# Altium PCB PCB1.PcbDoc
Units mm, origin at the board's own origin, x right, y up, seen from the top; angles counter-clockwise.
Board outline 152.4 x 101.6 mm, 2 copper layers (Top Layer, Bottom Layer); 12 components, 12 nets, 31 pads, 0 vias.
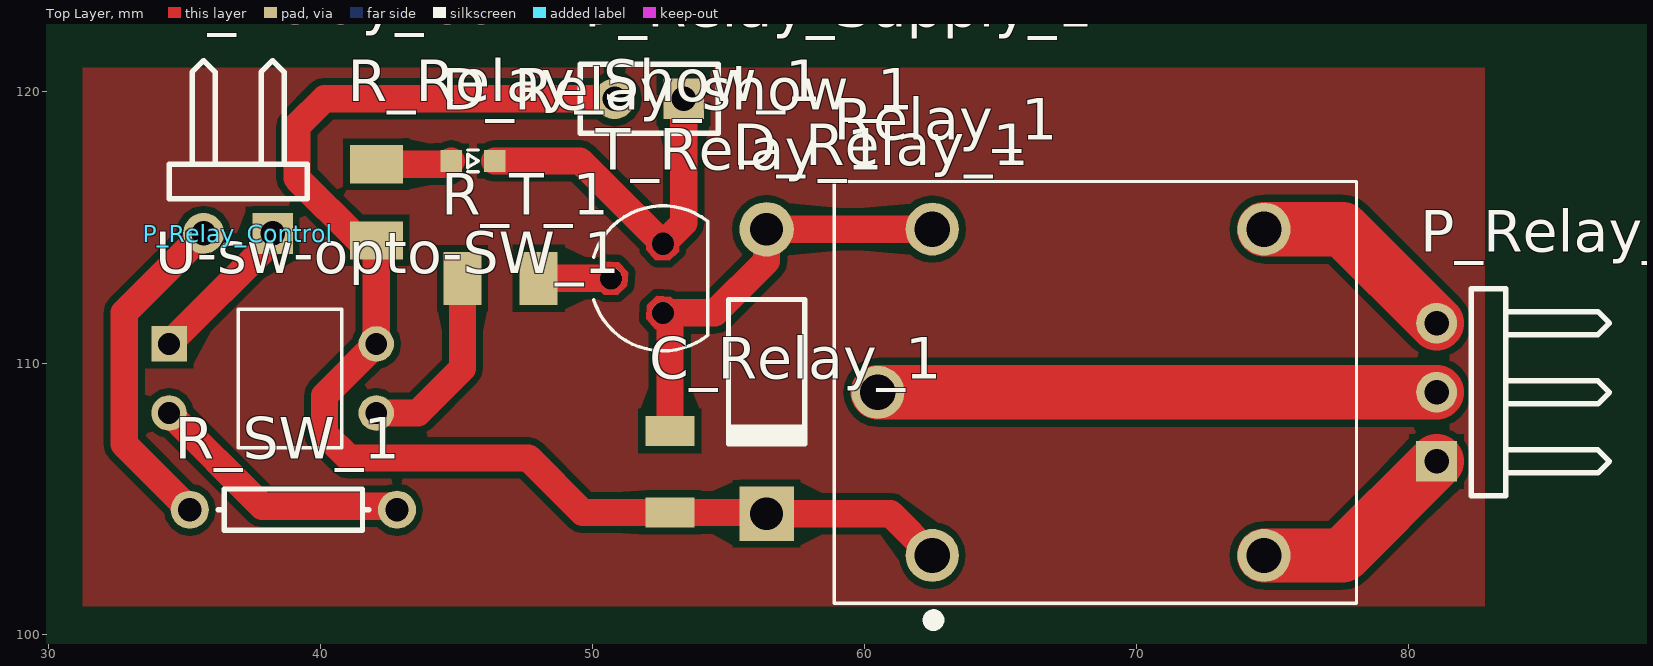
[diagram p0: Top Layer view]
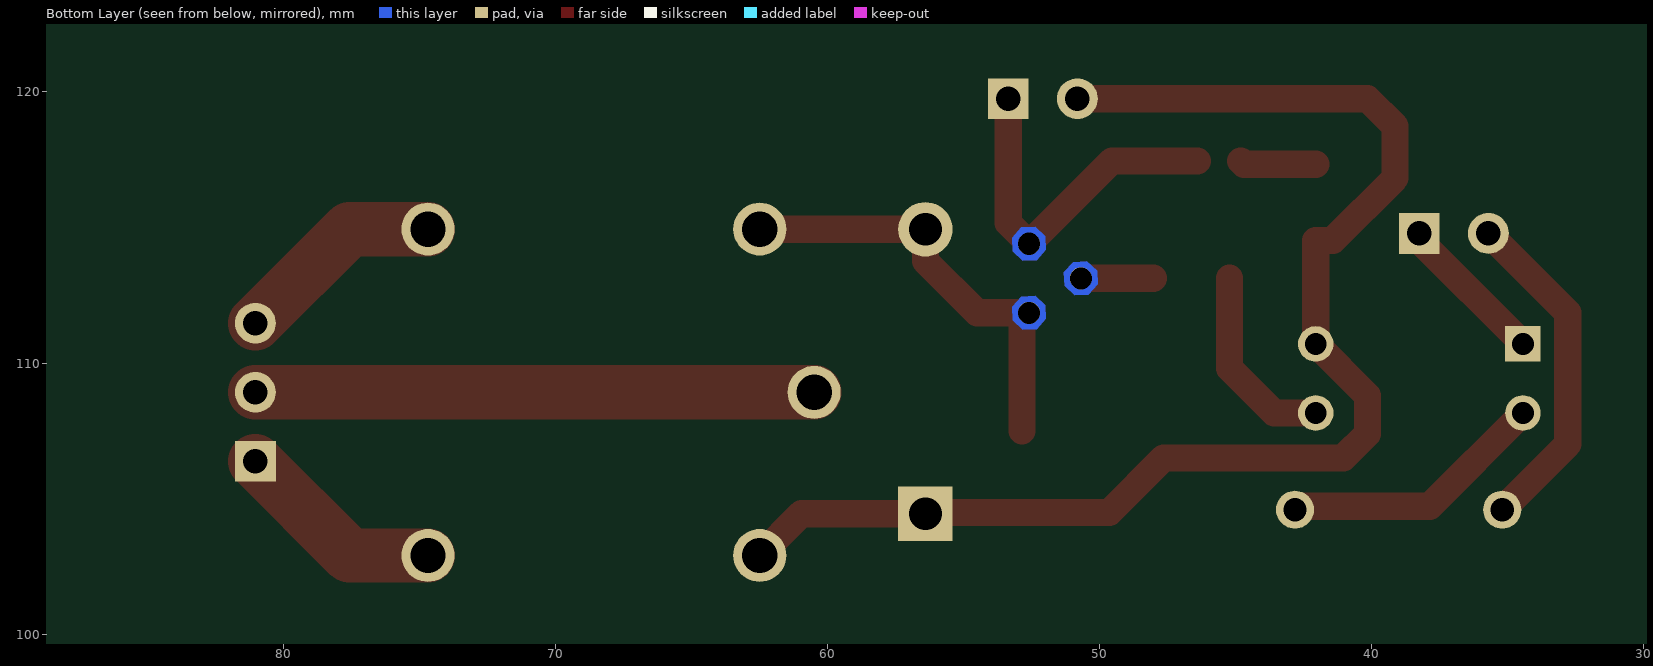
[diagram p1: Bottom Layer view, seen from below]

## Layer stack, top to bottom
Top Solder: solder mask 0.0102, Solder Resist, Dk 3.5
Top Layer: signal copper 0.0356
Dielectric 1: dielectric 0.32, FR-4, Dk 4.8
Bottom Layer: signal copper 0.0356
Bottom Solder: solder mask 0.0102, Solder Resist, Dk 3.5

## Board outline
25.4,25.4 177.8,25.4 177.8,127 25.4,127

## Design rules (kind name [scope] priority, off if disabled: settings)
Clearance [All] p1: gap=0.254 ignorepadtopadclearanceinfootprint=FALSE except(0: Arc-Hole Track-Hole SMDPad-Hole THPad-Hole Via-Hole Fill-Hole Poly-Hole Region-Hole Text-Hole)
PolygonConnect [All] p1: connectstyle=Relief reliefconductorwidth=0.254 reliefentries=4 polygonreliefangle="90 Angle" airgapwidth=0.254
RoutingVias [All] p1: holewidth=0.711 width=1.27 viastyle="Through Hole" minholewidth=0.711 minwidth=1.27 maxholewidth=0.711 maxwidth=1.27
SolderMaskExpansion [All] p1: expansion=0.102
Width [All] p1: maxlimit=2 minlimit=0.254 preferedwidth=0.5
30 further rules are at their usual default settings.

## Classes and differential pairs
component class Sheet1: C_Relay_1 D_Relay_1 D_Relay_Show_1 P_Relay_Control P_Relay_Out_1 R_SW_1 R_T_1 Relay_1 U-sw-opto-SW_1

## Components (designator, comment, footprint, x,y, rotation, side; value= is the part's Value field where it differs from the comment)
C_Relay_1 "1206YC105KA72A" CAPC3216X94N 52.832,106.003 r90 top
D_Relay_1 "Diode 1N4007" DO-41 56.388,109.686 r270 top
D_Relay_show_1 "WL-SMCW" WL-SMCW_0603 45.593,117.433 r180 top
P_Relay_Control "Header 2H" HDR1X2H 38.227,114.766 r180 top
P_Relay_Out_1 "Header 3H" HDR1X3H 81.026,106.384 r90 top
P_Relay_Supply_1 "Header 2" HDR1X2 53.34,119.719 r180 top
R_Relay_Show_1 "CRCW12061K00FKEA" RESC3216X65 42.037,115.909 r90 top value=18K
R_SW_1 "Res1" AXIAL-0.3 38.989,104.606 r0 top value=220R
R_T_1 "CRCW12061K00FKEA" RESC3216X65 46.609,113.115 r0 top value=1K
Relay_1 "1-1721150-5" TE_1-1721150-5 68.58,108.924 r0 top
T_Relay_1 "BC337" TO92 52.578,113.115 r90 top
U-sw-opto-SW_1 "TLP521-1" TLP521-1_TLP521-1(Primary) 34.417,110.702 r0 top

## Footprints (in the part's own frame and the unit in brackets; to place one, negate y for a bottom-side part, rotate by r counter-clockwise, add the part's x,y. Pads: shape width x height; smd on the part's side, far side on the other; paste and mask are expansions set on the pad)
AXIAL-0.3 [mm] "Axial Device, Thru-Hole; 2 Leads; 0.3 in Pin Spacing"
  round 1.4 hole 0.85: 1(-3.81,0) 2(3.81,0)
  silkscreen extent -2.77,-0.76 2.77,0.76
CAPC3216X94N [mil]
  rect 44x71 smd: 1(-59,0) 2(59,0)
DO-41 [mm] "Diode, Axial; Body 5.2 x 2.7 mm (LxDia. max), Lead Dia. 0.86 mm (max)"
  round 2 hole 1.2: 1(-5.23,0)
  rect 2x2 hole 1.2: 2(5.23,0)
  silkscreen extent -2.65,-1.4 2.75,1.4
HDR1X2 [mm] "Connector; Header; 2 Position"
  rect 1.5x1.5 hole 0.9: 1(0,0)
  round 1.5 hole 0.9: 2(2.54,0)
  silkscreen extent -1.27,-1.27 3.81,1.27
HDR1X2H [mm] "Connector; Header; 2 Position; Right Angle"
  rect 1.5x1.5 hole 0.9: 1(0,0)
  round 1.5 hole 0.9: 2(2.54,0)
  silkscreen extent -1.27,-6.35 3.81,-1.27
HDR1X3H [mm] "Connector; Header; 3 Position; Right Angle"
  rect 1.5x1.5 hole 0.9: 1(0,0)
  round 1.5 hole 0.9: 2(2.54,0) 3(5.08,0)
  silkscreen extent -1.27,-6.35 6.35,-1.27
RESC3216X65 [mm]
  rect 1.4x1.95 smd: 1(-1.4,0) 2(1.4,0)
TE_1-1721150-5 [mm]
  round 1.95 hole 1.3: 1(-6.1,-6) 2(-8.1,0) 3(-6.1,6) 4(6.1,-6) 5(6.1,6)
  silkscreen extent -9.7,-8.58 9.5,7.75
TLP521-1_TLP521-1(Primary) [mm]
  rect 1.308x1.308 hole 0.8: P$1(0,0)
  round 1.308 hole 0.8: P$2(0,-2.54) P$3(7.62,-2.54) P$4(7.62,0)
  silkscreen extent 2.54,-3.81 6.35,1.27
TO92 [mil]
  round 32 hole 32: 1(50,0) 2(0,75) 3(-50,0)
  Top Layer region: 74.43,8.89 60.99,23.56 41.11,24.43 26.44,10.99 25.57,-8.89 39.01,-23.56 58.89,-24.43 73.56,-10.99
  Top Layer region: 24.43,83.89 10.99,98.56 -8.89,99.43 -23.56,85.99 -24.43,66.11 -10.99,51.44 8.89,50.57 23.56,64.01
  Top Layer region: -25.57,8.89 -39.01,23.56 -58.89,24.43 -73.56,10.99 -74.43,-8.89 -60.99,-23.56 -41.11,-24.43 -26.44,-10.99
  Bottom Layer region: 74.43,8.89 60.99,23.56 41.11,24.43 26.44,10.99 25.57,-8.89 39.01,-23.56 58.89,-24.43 73.56,-10.99
  Bottom Layer region: 24.43,83.89 10.99,98.56 -8.89,99.43 -23.56,85.99 -24.43,66.11 -10.99,51.44 8.89,50.57 23.56,64.01
  Bottom Layer region: -25.57,8.89 -39.01,23.56 -58.89,24.43 -73.56,10.99 -74.43,-8.89 -60.99,-23.56 -41.11,-24.43 -26.44,-10.99
  Multi-Layer region: 74.43,8.89 60.99,23.56 41.11,24.43 26.44,10.99 25.57,-8.89 39.01,-23.56 58.89,-24.43 73.56,-10.99
  Multi-Layer region: 24.43,83.89 10.99,98.56 -8.89,99.43 -23.56,85.99 -24.43,66.11 -10.99,51.44 8.89,50.57 23.56,64.01
  Multi-Layer region: -25.57,8.89 -39.01,23.56 -58.89,24.43 -73.56,10.99 -74.43,-8.89 -60.99,-23.56 -41.11,-24.43 -26.44,-10.99
  silkscreen extent -105,-65 105,100
WL-SMCW_0603 [mm]
  rect 0.8x0.8 smd: 1(-0.8,0) 2(0.8,0)
  silkscreen extent -0.2,-0.4 0.2,0.4

## Part data
C_Relay_1: "Cap Ceramic 1uF 16V X7R 10% SMD 1206 125Â°C Embossed T/R", Package="1206 AVX", Availability=Unavailable, MF=AVX, MP=1206YC105KA72A, Price="1.22 USD", SnapEDA_Link=https://www.snapeda.com/parts/1206YC105KA72A/AVX/view-part/?ref=snap
D_Relay_1: "1 Amp General Purpose Rectifier", Code_JEDEC=DO-204-AL, ComponentLink1Description="Manufacturer Link", ComponentLink1URL=http://www.fairchildsemi.com/, ComponentLink2Description=Datasheet, ComponentLink2URL=http://www.fairchildsemi.com/ds/1N%2F1N4001.pdf, DatasheetVersion=1998, LatestRevisionDate=17-Jul-2002, LatestRevisionNote="Re-released for DXP Platform.", PackageDescription="Diode, Axial; Body 5.2 x 2.7 mm (LxDia. max), Lead Dia. 0.86 mm (max)", PackageReference=DO-41, PackageVersion=Aug-1999, Published=8-Jun-2000, Publisher="Altium Limited"
D_Relay_show_1: "LED, 1206, SUP. RED, 60MCD, 630NM; Bulb Size: -; LED Colour: Red; Luminous Intensi", Package="1206 Würth Elektronik", Availability=Good, MF=Wurth, MP=150120SS75000, Price="0.17 USD", SnapEDA_Link=https://www.snapeda.com/parts/150120SS75000/Wurth%20Electronics%20Inc/view-part/?ref=snap
P_Relay_Control: "Header, 2-Pin, Right Angle", LatestRevisionDate=17-Jul-2002, LatestRevisionNote="Re-released for DXP Platform.", Publisher="Altium Limited"
P_Relay_Out_1: "Header, 3-Pin, Right Angle", LatestRevisionDate=17-Jul-2002, LatestRevisionNote="Re-released for DXP Platform.", Publisher="Altium Limited"
P_Relay_Supply_1: "Header, 2-Pin", LatestRevisionDate=17-Jul-2002, LatestRevisionNote="Re-released for DXP Platform.", Publisher="Altium Limited"
R_Relay_Show_1 R_T_1: "Res Thick Film 1206 1K Ohm 1% 0.25W_1/4W_ Â±100ppm/C Molded SMD Automotive Paper T/R", Package="1206 Vishay", Availability=Good, MF=Vishay, MP=CRCW12061K00FKEA, Price="0.03 USD", SnapEDA_Link=https://www.snapeda.com/parts/CRCW12061K00FKEA/Vishay%20Dale/view-part/?ref=snap
R_SW_1: "Resistor", LatestRevisionDate=17-Jul-2002, LatestRevisionNote="Re-released for DXP Platform.", PackageDescription="Axial Device, Thru-Hole; 2 Leads; 0.3 in Pin Spacing", PackageReference=AXIAL-0.3, Published=8-Jun-2000, Publisher="Altium Limited"
Relay_1: "General Purpose Relay, ORWH Series, Power, Non Latching, SPDT, 24 VDC, 10 A", Package=None, Availability=Good, MF="TE Connectivity", MP=ORWH-SH-124D1F,000, Price="1.19 USD", SnapEDA_Link=https://www.snapeda.com/parts/ORWH-SH-124D1F%252C000/TE%2520Connectivity%2520Potter%2520%2526%2520Brumfield%2520Relays/view-part/?ref=snap
T_Relay_1: "NPN Bipolar Transistor", Package="TO-92 ON Semiconductor", Availability=Unavailable, MF="ON Semiconductor", MP=BC337, Price=None, SnapEDA_Link=https://www.snapeda.com/parts/BC337/ON%2520Semiconductor/view-part/?ref=snap
U-sw-opto-SW_1: "4PIN DIP/PKG PHOTOCOUPLER GaAs IRED & PHOTO-TRANSISTOR", Package=None, Availability=Unavailable, MF=Toshiba, MP=TLP521-1, Price=None, SnapEDA_Link=https://www.snapeda.com/parts/TLP521-1/Toshiba/view-part/?ref=snap

## Nets (pads, with @x,y where several pads share a name; then routed paths per layer and width w, separated by ;. In a path a pad name is that pad's centre, name@x,y a point inside that pad or via, vN(x,y) a via of type N, cw(c..) or ccw(c..) an arc to the next point about the centre after c; other vN are vias at no path point)
Control_1: P_Relay_Control.2 R_SW_1.1 | length 12.4
  Top Layer w1: R_SW_1.1 32.766,107.019 32.766,111.845 P_Relay_Control.2
GND_Relay: D_Relay_show_1.1 P_Relay_Supply_1.1 T_Relay_1.1 | length 13.1
  Top Layer w1: D_Relay_show_1.1 49.53,117.433 T_Relay_1.1 53.34,115.147 P_Relay_Supply_1.1
NetC_Relay_1_2: C_Relay_1.2 D_Relay_1.1 Relay_1.3 T_Relay_1.3 | length 16.3
  Top Layer w1: C_Relay_1.2 52.832,111.591 T_Relay_1.3 54.483,111.845 56.388,113.75 D_Relay_1.1 62.472,114.916 Relay_1.3
NetD_Relay_show_1_2: D_Relay_show_1.2 R_Relay_Show_1.2 | length 2.8
  Top Layer w1: R_Relay_Show_1.2 44.669,117.309 D_Relay_show_1.2
NetP_Relay_Out_1_1: P_Relay_Out_1.1 Relay_1.4 | length 7.8
  Top Layer w2: Relay_1.4 77.566,102.924 P_Relay_Out_1.1
NetP_Relay_Out_1_2: P_Relay_Out_1.2 Relay_1.2 | length 20.5
  Top Layer w2: Relay_1.2 P_Relay_Out_1.2
NetP_Relay_Out_1_3: P_Relay_Out_1.3 Relay_1.5 | length 7.8
  Top Layer w2: Relay_1.5 77.566,114.924 P_Relay_Out_1.3
NetR_SW_1_2: R_SW_1.2 U-sw-opto-SW_1.P$2 | length 9.9
  Top Layer w1: U-sw-opto-SW_1.P$2 37.846,104.733 42.672,104.733 R_SW_1.2
NetR_T_1_1: R_T_1.1 U-sw-opto-SW_1.P$3 | length 7.2
  Top Layer w1: U-sw-opto-SW_1.P$3 43.561,108.162 45.209,109.81 R_T_1.1
NetR_T_1_2: R_T_1.2 T_Relay_1.2 | length 2.7
  Top Layer w1: R_T_1.2 T_Relay_1.2
VCC_3V3: P_Relay_Control.1 U-sw-opto-SW_1.P$1 | length 5.6
  Top Layer w1: U-sw-opto-SW_1.P$1 38.227,114.512 P_Relay_Control.1
VCC_Relay: C_Relay_1.1 D_Relay_1.2 P_Relay_Supply_1.2 R_Relay_Show_1.1 Relay_1.1 U-sw-opto-SW_1.P$4 | length 50
  Top Layer w1: P_Relay_Supply_1.2 40.132,119.719 39.116,118.703 39.116,116.798 41.405,114.509 R_Relay_Show_1.1 U-sw-opto-SW_1.P$4 40.132,108.797 40.132,107.4 41.021,106.511 47.625,106.511 49.632,104.504 C_Relay_1.1 56.34,104.504 D_Relay_1.2 60.948,104.456 Relay_1.1

## Polygon pours and split planes (outlines as drawn)
GND_Relay on Top Layer "Top Layer-No Net" (solid, pour order 6): 82.804,101.05 31.242,101.05 31.242,120.862 82.804,120.862

## Text inside footprints (layer, text, board x,y; h text height)
T_Relay_1: Mechanical 1 "2" at 52.191,112.478 h1.88 r90; Mechanical 1 "3" at 52.828,110.954 h1.88 r90; Mechanical 1 "1" at 52.828,114.26 h1.88 r90